# Altium PCB M2male_miniDP.PcbDoc
Units mm, origin at the board's own origin, x right, y up, seen from the top; angles counter-clockwise.
Board outline 22 x 80 mm, 2 copper layers (Top Layer, Bottom Layer); 7 components, 18 nets, 103 pads, 71 vias.
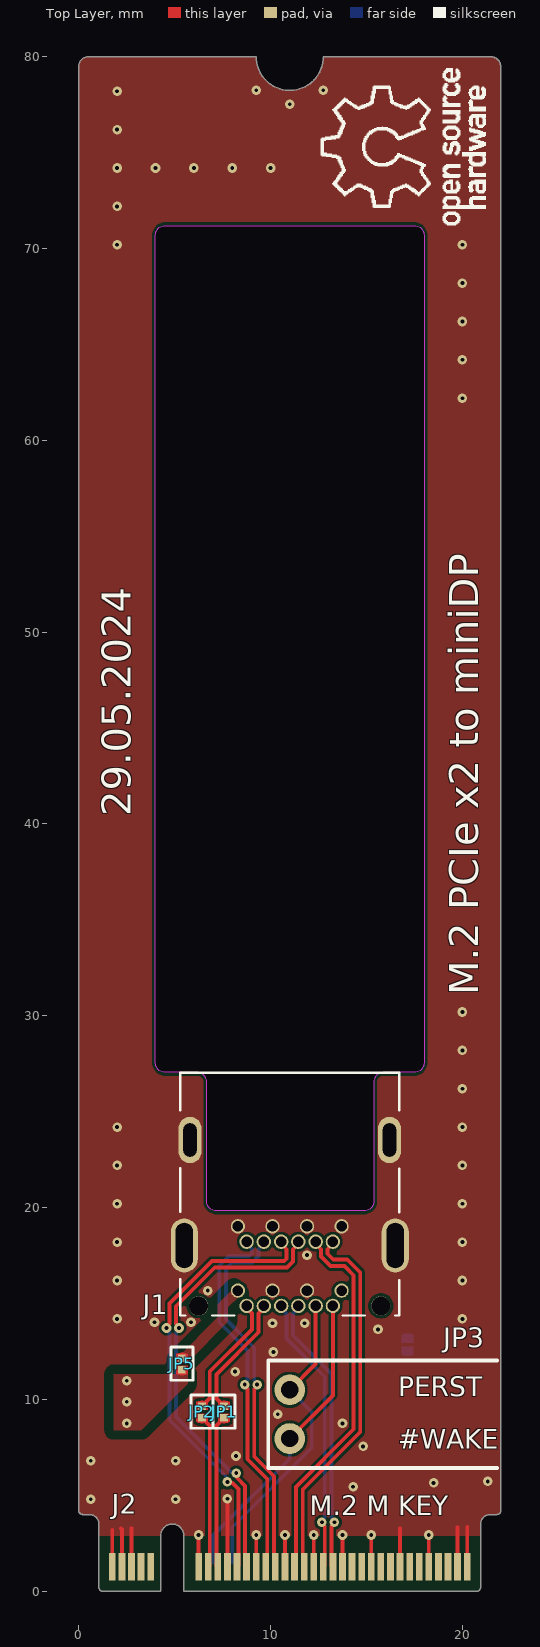
[diagram p0: Top Layer view]
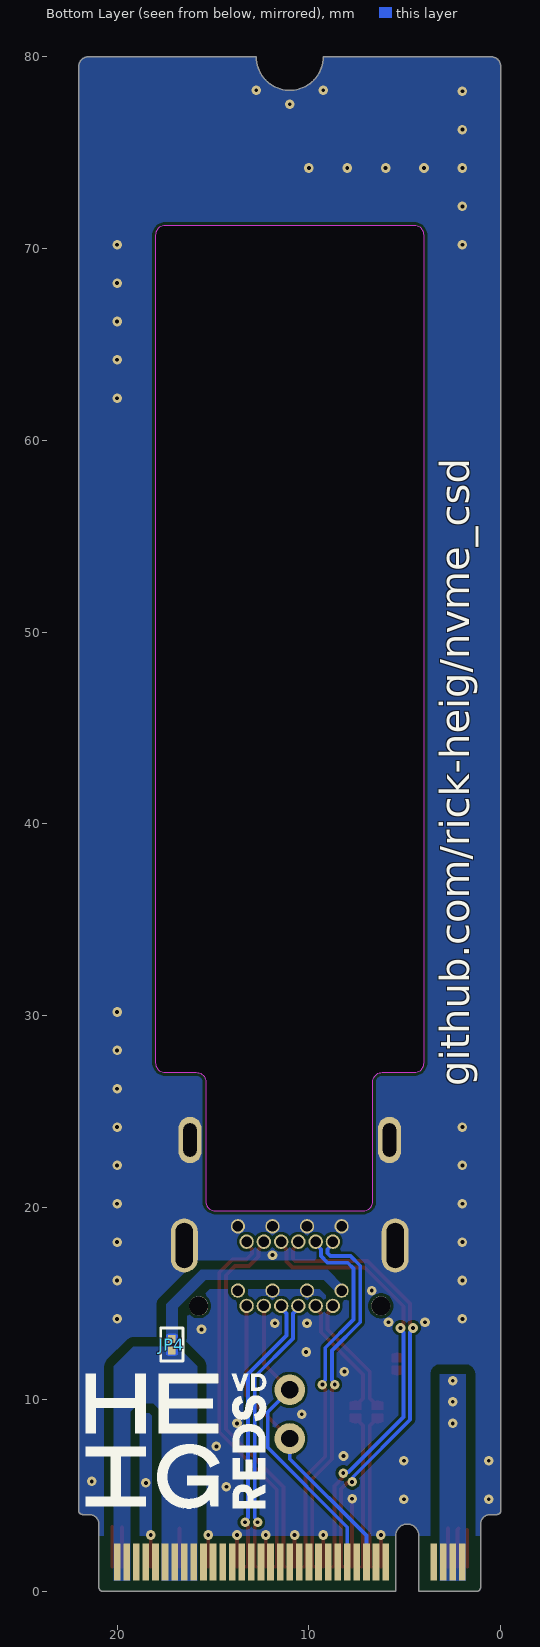
[diagram p1: Bottom Layer view, seen from below]

## Layer stack, top to bottom
Top Solder: solder mask 0.0102, Solder Resist, Dk 3.5
Top Layer: signal copper 0.0356
Dielectric 1: dielectric 0.32, FR-4, Dk 4.8
Bottom Layer: signal copper 0.0356
Bottom Solder: solder mask 0.0102, Solder Resist, Dk 3.5

## Board outline
1.05,0.2 ccw(c1.25,0.2) 1.25,0 4.275,0 4.275,2.9 cw(c4.875,2.9) 4.875,3.5 cw(c4.875,2.9) 5.475,2.9 5.475,0 20.75,0 ccw(c20.75,0.2) 20.95,0.2 20.95,3.5 cw(c21.45,3.5) 21.45,4 21.8,4 ccw(c21.8,4.2) 22,4.2 22,79.5 ccw(c21.5,79.5) 21.5,80 12.75,80 cw(c11,80) 9.25,80 0.5,80 ccw(c0.5,79.5) 0,79.5 0,4.2 ccw(c0.2,4.2) 0.2,4 0.55,4 cw(c0.55,3.5) 1.05,3.5
cut-out: 6.675,26.55 ccw(c6.175,26.55) 6.175,27.05 4.5,27.05 cw(c4.5,27.55) 4,27.55 4,70.7 cw(c4.5,70.7) 4.5,71.2 17.5,71.2 cw(c17.5,70.7) 18,70.7 18,27.55 cw(c17.5,27.55) 17.5,27.05 15.875,27.05 ccw(c15.875,26.55) 15.375,26.55 15.375,20.325 cw(c14.875,20.325) 14.875,19.825 7.175,19.825 cw(c7.175,20.325) 6.675,20.325

## Design rules (kind name [scope] priority, off if disabled: settings)
Clearance [All] p1: gap=0.15 ignorepadtopadclearanceinfootprint=FALSE except(0.149: Track-SMDPad SMDPad-SMDPad SMDPad-Poly; 0.5: Poly-Poly)
Clearance Clearance_DIFF [InAnyDifferentialPair] p2: gap=0.15 ignorepadtopadclearanceinfootprint=FALSE
Clearance Clearance_TOP [InNamedPolygon('GND-TOP')] p3: gap=0.15 ignorepadtopadclearanceinfootprint=FALSE
Clearance Clearance_BOTTOM [InNamedPolygon('GND-BOTTOM')] p4: gap=0.15 ignorepadtopadclearanceinfootprint=FALSE
ComponentClearance [All] p1: gap=0.254 collisioncheckmode=3 verticalgap=0.254 showdistances=FALSE donotcheckwithout3dbody=TRUE
DiffPairsRouting [All] p1: maxlimit=0.15 minlimit=0.15 mostfreqgap=0.15 toplayer_minwidth=0.2 toplayer_maxwidth=0.2 toplayer_prefwidth=0.2 bottomlayer_minwidth=0.2 bottomlayer_maxwidth=0.2 bottomlayer_prefwidth=0.2 impedanceprofiledriven=TRUE impedanceprofileid={8BE430F4-6E11-4254-9D0B-8478A02E9357} maxuncoupledlength=12.7
HoleSize [All] p1: absolutevalues=TRUE maxlimit=5 minlimit=0.025 maxpercent=80.000 minpercent=20.000
HoleToHoleClearance [All] p1: gap=0.15 allowstackedmicrovias=TRUE
Length [All] p1: maxlimit=2540 minlimit=0
MatchedLengths MatchLengths_xSignals_J2_J1 [All] p1: tolerance=0.05 checknetsindiffpair=TRUE checkdiffpairvsdiffpair=FALSE checkxsignals=FALSE checkothers=FALSE
MinimumSolderMaskSliver [All] p1: minsoldermaskwidth=0.075
PlaneConnect [All] p1: planeconnectstyle=Direct reliefexpansion=0.508 reliefentries=4 reliefconductorwidth=0.254 reliefairgap=0.254
PolygonConnect PolygonConnect_10 [All vs IsNamedPolygon('NETJ1_20_POWER')] p1: connectstyle=Direct reliefconductorwidth=0.254 reliefentries=4 polygonreliefangle="90 Angle" airgapwidth=0.254
PolygonConnect PolygonConnect_9 [All vs IsNamedPolygon('3.3V_1')] p2: connectstyle=Direct reliefconductorwidth=0.254 reliefentries=4 polygonreliefangle="90 Angle" airgapwidth=0.254
PolygonConnect PolygonConnect_8 [All vs IsNamedPolygon('3.3V_2')] p3: connectstyle=Direct reliefconductorwidth=0.254 reliefentries=4 polygonreliefangle="90 Angle" airgapwidth=0.254
PolygonConnect PolygonConnect_7 [All vs IsNamedPolygon('Bottom Layer-3.3V')] p4: connectstyle=Direct reliefconductorwidth=0.254 reliefentries=4 polygonreliefangle="90 Angle" airgapwidth=0.254
PolygonConnect PolygonConnect_6 [All vs IsNamedPolygon('NetJ1_20_POWER')] p5: connectstyle=Direct reliefconductorwidth=0.254 reliefentries=4 polygonreliefangle="90 Angle" airgapwidth=0.254
PolygonConnect PolygonConnect_5 [All vs IsNamedPolygon('NetJ1_20_POWER')] p6: connectstyle=Direct reliefconductorwidth=0.254 reliefentries=4 polygonreliefangle="90 Angle" airgapwidth=0.254
PolygonConnect PolygonConnect_4 [All vs IsNamedPolygon('GND-BOTTOM')] p7: connectstyle=Direct reliefconductorwidth=0.254 reliefentries=4 polygonreliefangle="90 Angle" airgapwidth=0.254
PolygonConnect PolygonConnect_3 [All vs IsNamedPolygon('GND-TOP')] p8: connectstyle=Direct reliefconductorwidth=0.254 reliefentries=4 polygonreliefangle="90 Angle" airgapwidth=0.254
PolygonConnect PolygonConnect_2 [All vs IsNamedPolygon('GND-BOTTOM')] p9: connectstyle=Direct reliefconductorwidth=0.254 reliefentries=4 polygonreliefangle="90 Angle" airgapwidth=0.254
PolygonConnect PolygonConnect_1 [All vs IsNamedPolygon('GND-BOTTOM')] p10: connectstyle=Direct reliefconductorwidth=0.254 reliefentries=4 polygonreliefangle="90 Angle" airgapwidth=0.254
PolygonConnect [All] p11: connectstyle=Relief reliefconductorwidth=0.254 reliefentries=4 polygonreliefangle="90 Angle" airgapwidth=0.254
RoutingVias [All] p1: holewidth=0.2 width=0.5 viastyle="Through Hole" minholewidth=0.15 minwidth=0.4 maxholewidth=0.4 maxwidth=0.8
SilkToSilkClearance [All] p1: silktosilkclearance=0.2
SilkToSolderMaskClearance [IsPad] p1: minsilkscreentomaskgap=0.2 clearancetoexposedcopper=TRUE
SolderMaskExpansion [All] p1: expansion=0.102 istentingtop=FALSE
SupplyNets "Schematic Supply Nets_3" [InNet('3.3V_2')] p1: voltage=0.000
SupplyNets "Schematic Supply Nets_2" [InNet('3.3V_1')] p2: voltage=0.000
SupplyNets "Schematic Supply Nets" [InNet('GND')] p3: voltage=0.000
Width [All] p1: maxlimit=0.5 minlimit=0.1 preferedwidth=0.2
22 further rules are at their usual default settings.

## Classes and differential pairs
differential pair PET1: +PET1_P -PET1_N
differential pair PET0: +PET0_P -PET0_N
differential pair PER1: +PER1_P -PER1_N
differential pair PER0: +PER0_P -PER0_N
differential pair miniDP_CLK: +miniDP_CLK_P -miniDP_CLK_N
differential pair CLK: +CLK_P -CLK_N

## Components (designator, comment, footprint, x,y, rotation, side; value= is the part's Value field where it differs from the comment)
J1 "2129320-3" CONN_2129320-3 11,23.525 r180 top locked
J2 "NGFF_M_V2" M.2-M-KEY-2280-V2 11,0 r0 top locked value=NGFF_M
JP1 "JUMPER_A_SOUDER" "JUMPER_A_SOUDER (0201)" 7.575,9.35 r90 top value=0201
JP2 "JUMPER_A_SOUDER" "JUMPER_A_SOUDER (0201)" 6.425,9.35 r90 top value=0201
JP3 "HEADER_2" "Barette simple 2.54mm  2 POLES 90 degres MALE" 11,9.23 r90 top
JP4 "JUMPER_A_SOUDER" "JUMPER_A_SOUDER (0201)" 17.15,12.85 r90 bottom value=0201
JP5 "JUMPER_A_SOUDER" "JUMPER_A_SOUDER (0201)" 5.375,11.85 r90 top value=0201

## Footprints (in the part's own frame and the unit in brackets; to place one, negate y for a bottom-side part, rotate by r counter-clockwise, add the part's x,y. Pads: shape width x height; smd on the part's side, far side on the other; paste and mask are expansions set on the pad)
"Barette simple 2.54mm  2 POLES 90 degres MALE" [mm] "Barette simple 2.54mm SMD 2 pôles - 90 degres Mâle"
  round 1.6 hole 0.9 mask+0.1: 1(-1.27,0) 2(1.27,0)
  silkscreen extent -2.8,-10.8 2.8,1.13, body extent -2.54,-10.81 2.54,0.3, height 3.05
CONN_2129320-3 [mm]
  round 0.75 hole 0.55: 1G(-2.7,4.5) 2(-2.7,7.85) 3(-2.25,5.3) 4(-2.25,8.65) 5(-1.35,5.3) 6(-1.35,8.65) 7G(-0.9,4.5) 8G(-0.9,7.85) 9(-0.45,5.3) 10(-0.45,8.65) 11(0.45,5.3) 12(0.45,8.65) 13G(0.9,4.5) 14G(0.9,7.85) 15(1.35,5.3) 16(1.35,8.65) 17(2.25,5.3) 18(2.25,8.65) 19G(2.7,4.5) 20_POWER(2.7,7.85)
  oval 1.408x2.816 hole 0.9 slot 2.35 at 90 deg: 21(-5.5,5.5) 22(5.5,5.5)
  oval 1.208x2.416 hole 0.7 slot 1.74 at 90 deg: 23(5.2,0) 24(-5.2,0)
  round 1 hole 1 unplated: ""(-4.75,8.65) ""(4.75,8.65)
  silkscreen extent -5.7,-3.5 5.7,9.15, body extent -5.72,-3.52 5.68,9.13, height 4.21
"JUMPER_A_SOUDER (0201)" [mm]
  rect 0.4x0.4 smd paste-10: 1(-0.3,0) 2(0.3,0)
  Top Layer region: 0.1,0.3 0.1,-0.3 0.525,-0.3 0.584,0 0.525,0.3 0.525,0.3
  Top Layer region: -0.1,-0.3 -0.1,0.3 -0.525,0.3 -0.584,0 -0.525,-0.3 -0.525,-0.3
  silkscreen extent -0.85,-0.58 0.87,0.58
M.2-M-KEY-2280-V2 [mm] "M.2-KEY-M"
  rect 0.35x1.45 smd mask+0: 1(9.25,1.275) 3(8.75,1.275) 5(8.25,1.275) 7(7.75,1.275) 9(7.25,1.275) 11(6.75,1.275) 13(6.25,1.275) 15(5.75,1.275) 17(5.25,1.275) 19(4.75,1.275) 21(4.25,1.275) 23(3.75,1.275) 25(3.25,1.275) 27(2.75,1.275) 29(2.25,1.275) 31(1.75,1.275) 33(1.25,1.275) 35(0.75,1.275) 37(0.25,1.275) 39(-0.25,1.275) 41(-0.75,1.275) 43(-1.25,1.275) 45(-1.75,1.275) 47(-2.25,1.275) 49(-2.75,1.275) 51(-3.25,1.275) 53(-3.75,1.275) 55(-4.25,1.275) 57(-4.75,1.275) 67(-7.25,1.275) 69(-7.75,1.275) 71(-8.25,1.275) 73(-8.75,1.275) 75(-9.25,1.275)
  rect 0.35x1.95 smd far side mask+0: 2(9,1.525) 4(8.5,1.525) 6(8,1.525) 8(7.5,1.525) 10(7,1.525) 12(6.5,1.525) 14(6,1.525) 16(5.5,1.525) 18(5,1.525) 20(4.5,1.525) 22(4,1.525) 24(3.5,1.525) 26(3,1.525) 28(2.5,1.525) 30(2,1.525) 32(1.5,1.525) 34(1,1.525) 36(0.5,1.525) 38(0,1.525) 40(-0.5,1.525) 42(-1,1.525) 44(-1.5,1.525) 46(-2,1.525) 48(-2.5,1.525) 50(-3,1.525) 52(-3.5,1.525) 54(-4,1.525) 56(-4.5,1.525) 58(-5,1.525) 68(-7.5,1.525) 70(-8,1.525) 72(-8.5,1.525) 74(-9,1.525)

## Part data
J1: "Conn Display Port RCP 20 POS 0.9mm/1.8mm Solder RA Thru-Hole 20 Terminal 1 Port T/R", Package=None, Centerline_Pitch=".6 mm[.02 in]", Digi-Key_Part_Number=A120537CT-ND, Digi-Key_Purchase_URL=https://www.digikey.com/product-detail/en/te-connectivity-amp-connectors/2129320-3/A120537CT-ND/5021748?utm_source=snapeda&utm_medium=aggregator&utm_campaign=symbol, EU_RoHS_Compliance=Compliant, MF="TE Connectivity", MP=2129320-3, Number_of_Positions=20, Product_Type=Connector, SnapEDA_Link=https://www.snapeda.com/parts/2129320-3/TE%20Connectivity%20AMP%20Connectors/view-part/1192429/?ref=snap, TE_purchase_URL=https://www.te.com/usa-en/product-2129320-3.html?te_bu=Cor&te_type=disp&te_campaign=seda_glo_cor-seda-global-disp-prtnr-fy19-seda-model-bom-cta_sma-317_1&elqCampaignId=32493
JP1 JP2 JP4 JP5: library part 683, "Pont à souder sur print", Component=Connector, Component Type Category Connector Type="Jumper à souder", ID=683, RoHS Compliant=False
JP3: library part 421, "Barrette mâle 90 degrés 2P 2,54 mm", Manufacturer="TE Connectivity", Manufacturer P/N=5-826631-0, Supplier Part Number 1=122359, Component=Connector, Component Type Category Connector Type="Barrette 2.54mm 90 degres", ComponentLink1Description=Datasheet, ComponentLink1URL=http://www.te.com/catalog/pn/en/5-826631-0, ComponentLink2Description=Supplier, ComponentLink2URL=http://www.distrelec.ch/fr/Barrette-%C3%A0-broches-50-p%C3%B4les-1-x50P-TE-Connectivity-5-826631-0/p/14371409?q=122359&page=1&origPos=1&origPageSize=10&simi=99.3, ID=421, Pitch=2,54mm, RoHS Compliant=True, Supplier 1=Distrelec, Supplier 2=Mouser, Supplier Part Number 2=571-5-826631-0

## Via types
v1: diameter 0.5, hole 0.2, Top Layer to Bottom Layer, tented both sides, 71 vias

## Nets (pads, with @x,y where several pads share a name; then routed paths per layer and width w, separated by ;. In a path a pad name is that pad's centre, name@x,y a point inside that pad or via, vN(x,y) a via of type N, cw(c..) or ccw(c..) an arc to the next point about the centre after c; other vN are vias at no path point)
3.3V_1: J2.2 J2.4 J2.12 J2.14 J2.16 J2.18 JP4.1
3.3V_2: J2.70 J2.72 J2.74 JP5.1
  other v1: 2.5,8.75 2.5,9.875 2.5,10.975
CLK_N: J2.53 JP1.1 | length 8
  Top Layer w0.2: J2.53 7.175,1.35 7.175,2.104 7.175,5.589 7.175,8.65 JP1.1
CLK_P: J2.55 JP2.1 | length 8
  Top Layer w0.2: JP2.1 6.825,8.65 6.825,5.444 6.825,2.104 6.825,1.35 J2.55
GND: J1.1G J1.7G J1.8G J1.13G J1.14G J1.19G J1.21 J1.22 J1.23 J1.24 J2.1 J2.3 J2.9 J2.15 J2.21 J2.27 J2.33 J2.39 J2.45 J2.51 J2.57 J2.71 J2.73 J2.75 | length 27.1
  Top Layer w0.2: J2.75 1.75,3.2 ; 2.2,3.275 2.25,3.225 J2.73 ; J2.71 2.75,3.275 ; J2.57 v1(6.25,2.933) ; J2.51 v1(7.75,4.825) ; J2.45 v1(9.25,2.933) ; J2.39 v1(10.75,2.933) ; J2.33 v1(12.25,2.933) ; J2.27 v1@13.75,2.883 ; J2.21 v1@15.25,2.883 ; J2.15 16.75,3.275 ; J2.9 v1@18.25,2.883 ; J2.3 19.75,3.325 ; J2.1 20.25,3.35
  other v1: 13.75,2.933 15.25,2.933 18.25,2.933 0.625,4.8 5.05,4.8 14.3,5.45 18.5,5.65 21.325,5.725 0.625,6.8 5.05,6.8 8.2,7.05 14.825,7.55 13.75,8.75 10.375,9.225 8.15,11.45 10.15,12.475 15.6,13.65 10.1,13.975 11.775,13.975 3.95,14.025 5.85,14.025 2,14.2 20,14.2 6.725,15.675 2,16.2 20,16.2 11.9,17.525 2,18.2 20,18.2 2,20.2 20,20.2 2,22.2 20,22.2 2,24.2 20,24.2 20,26.2 20,28.2 20,30.2 20,62.2 20,64.2 20,66.2 20,68.2 2,70.2 20,70.2 2,72.2 2,74.2 4,74.2 6,74.2 8,74.2 10,74.2 2,76.2 11,77.525 2,78.2 9.25,78.25 12.75,78.25
miniDP_CLK_N: J1.16 JP1.2 | length 6.4
  Top Layer w0.2: JP1.2 7.175,10.05 7.175,11.3 9.375,13.5 9.375,14.483 9.65,14.758 J1.16
miniDP_CLK_P: J1.18 JP2.2 | length 6.4
  Top Layer w0.2: JP2.2 6.825,10.05 6.825,11.445 9.025,13.645 9.025,14.483 8.75,14.758 J1.18
NetJ1_20_POWER: J1.20_POWER JP4.2 JP5.2
PER0_N: J1.15 J2.41 | length 19.6
  Top Layer w0.2: v1(9.3,10.775) 9.3,10.694 9.15,10.544 9.15,7.023 10.175,5.998 10.175,2.104 10.175,1.35 J2.41
  Bottom Layer w0.2: v1(9.3,10.775) 9.3,10.856 9.15,11.006 9.15,12.697 7.675,14.172 7.675,16.825 7.975,17.125 9.025,17.125 9.375,17.475 9.375,17.833 9.65,18.108 J1.15
PER0_P: J1.17 J2.43 | length 19.6
  Top Layer w0.2: v1(8.65,10.775) 8.65,10.694 8.8,10.544 8.8,6.878 9.825,5.853 9.825,2.104 9.825,1.35 J2.43
  Bottom Layer w0.2: v1(8.65,10.775) 8.65,10.856 8.8,11.006 8.8,12.552 7.325,14.027 7.325,16.97 7.83,17.475 8.88,17.475 9.025,17.62 9.025,17.833 8.75,18.108 J1.17
PER1_N: J1.10 J2.29 | length 14.7
  Top Layer w0.2: J2.29 13.175,1.35 13.175,2.104 13.175,3.369 13.325,3.519 v1(13.325,3.6)
  Bottom Layer w0.2: J1.10 11.45,14.758 11.175,14.483 11.175,13.325 13.175,11.325 13.175,3.831 13.325,3.681 v1(13.325,3.6)
PER1_P: J1.12 J2.31 | length 14.7
  Top Layer w0.2: v1(12.675,3.6) 12.675,3.519 12.825,3.369 12.825,2.104 12.825,1.35 J2.31
  Bottom Layer w0.2: J1.12 10.55,14.758 10.825,14.483 10.825,13.18 12.825,11.18 12.825,3.831 12.675,3.681 v1(12.675,3.6)
PERST: J1.6 J2.50 JP3.2 | length 16.1
  Top Layer w0.2: JP3.2 12.35,11.85 J1.6
  Bottom Layer w0.2: J2.50 8,3.338 12.15,7.488 12.15,9.35 JP3.2
PET0_N: J1.9 J2.47 | length 23.6
  Top Layer w0.2: v1(5.225,13.725) 5.225,13.806 5.075,13.956 5.075,14.855 7.09,16.87 10.853,16.87 11.175,17.192 11.175,17.833 11.45,18.108 J1.9 ; v1(8.21,6.16) 8.267,6.102 8.267,5.89 8.675,5.482 8.675,2.017 8.675,1.35 J2.47
  Bottom Layer w0.2: v1(5.225,13.725) 5.225,13.644 5.075,13.494 5.075,9.082 7.94,6.217 8.152,6.217 v1(8.21,6.16)
PET0_P: J1.11 J2.49 | length 23.6
  Top Layer w0.2: v1(4.575,13.725) 4.575,13.806 4.725,13.956 4.725,15 6.945,17.22 10.708,17.22 10.825,17.337 10.825,17.833 10.55,18.108 J1.11 ; v1(7.75,5.7) 7.807,5.643 8.02,5.643 8.325,5.337 8.325,2.017 8.325,1.35 J2.49
  Bottom Layer w0.2: v1(4.575,13.725) 4.575,13.644 4.725,13.494 4.725,8.937 7.693,5.97 7.693,5.757 v1(7.75,5.7)
PET1_N: J1.3 J2.35 | length 19.5
  Top Layer w0.2: J2.35 11.675,1.35 11.675,2.017 11.675,5.297 14.675,8.297 14.675,16.62 13.995,17.3 13.27,17.3 12.975,17.595 12.975,17.833 13.25,18.108 J1.3
PET1_P: J1.5 J2.37 | length 19.5
  Top Layer w0.2: J2.37 11.325,1.35 11.325,2.017 11.325,5.442 14.325,8.442 14.325,16.475 13.85,16.95 13.125,16.95 12.625,17.45 12.625,17.833 12.35,18.108 J1.5
PEWAKE: J1.4 J2.54 JP3.1 | length 15.9
  Top Layer w0.2: JP3.1 13.25,10.21 J1.4
  Bottom Layer w0.2: J2.54 7,2.9 11,6.9 JP3.1
pads on no net: J1. J1.2 J2.5 J2.6 J2.7 J2.8 J2.10 J2.11 J2.13 J2.17 J2.19 J2.20 J2.22 J2.23 J2.24 J2.25 J2.26 J2.28 J2.30 J2.32 J2.34 J2.36 J2.38 J2.40 J2.42 J2.44 J2.46 J2.48 J2.52 J2.56 J2.58 J2.67 J2.68 J2.69

## Polygon pours and split planes (outlines as drawn)
no net on Bottom Solder "GND-001" (solid): 13.85,80 cw(c11,80) 8.15,80 9.25,80 ccw(c11,80) 12.75,80
no net on Top Solder "GND-001" (solid): 13.85,80 cw(c11,80) 8.15,80 9.25,80 ccw(c11,80) 12.75,80
3.3V_1 on Bottom Layer "3.3V_1" (solid, pour order 5): 17.675,9.35 18.125,9.8 18.875,9.8 19.325,9.35 19.325,0.55 20.175,0.55 20.175,11.725 19.15,12.75 16.85,12.75 15.825,11.725 15.825,0.55 17.675,0.55
GND on Bottom Layer "GND-bottom" (solid, pour order 11): 1.05,2.9 4.275,2.9 cw(c4.875,2.9) 4.875,3.5 cw(c4.875,2.9) 5.475,2.9 20.95,2.9 20.95,3.5 cw(c21.45,3.5) 21.45,4 21.8,4 ccw(c21.8,4.2) 22,4.2 22,79.5 ccw(c21.5,79.5) 21.5,80 12.75,80 cw(c11,80) 9.25,80 0.5,80 ccw(c0.5,79.5) 0,79.5 0,4.2 ccw(c0.2,4.2) 0.2,4 0.55,4 cw(c0.55,3.5) 1.05,3.5
NetJ1_20_POWER on Bottom Layer "NetJ1_20_POWER" (solid, pour order 9): 16.85,12.95 16.85,14.775 15.375,16.25 9.225,16.25 8.575,15.6 8.225,15.95 9.025,16.75 15.65,16.75 17.45,14.95 17.45,12.95
3.3V_2 on Bottom Layer "3.3V_2" (solid, pour order 1): 1.825,0.55 1.825,11.325 3.175,11.325 3.175,0.55
NetJ1_20_POWER on Top Layer "NETJ1_20_POWER" (solid, pour order 2): 5.075,11.95 5.075,12.1 7.25,14.275 7.25,14.975 8.1,15.825 8.45,15.475 7.775,14.8 7.775,14.05 5.675,11.95
3.3V_2 on Top Layer "3.3V_2" (solid, pour order 2): 5.675,11.325 1.825,11.325 1.825,8.4 3.25,8.4 5.675,10.825
GND on Top Layer "GND-TOP" (solid, pour order 12): 1.05,2.9 4.275,2.9 cw(c4.875,2.9) 4.875,3.5 cw(c4.875,2.9) 5.475,2.9 20.95,2.9 20.95,3.5 cw(c21.45,3.5) 21.45,4 21.8,4 ccw(c21.8,4.2) 22,4.2 22,79.5 ccw(c21.5,79.5) 21.5,80 12.75,80 cw(c11,80) 9.25,80 0.5,80 ccw(c0.5,79.5) 0,79.5 0,4.2 ccw(c0.2,4.2) 0.2,4 0.55,4 cw(c0.55,3.5) 1.05,3.5

## Silkscreen, mask and mechanical layers (free items; w line width, h text height)
Top Overlay:
  drawing of 18 lines, arcs and shapes, not listed
  text "29.05.2024" at 2.721,40.404 h1.52 r90
  text "M.2 PCIe x2 to miniDP" at 20.821,31.079 h1.52 r90
  text "PERST" at 16.65,10.167 h1
  text "#WAKE" at 16.65,7.425 h1
  text "M.2 M KEY" at 12.05,3.95 h1
Bottom Overlay:
  drawing of 10 lines, arcs and shapes, not listed
  text "github.com/rick-heig/nvme_csd" at 1.637,26.329 h1.52 r270
Mechanical 1:
  lines w0.2: 6.175,27.05 cw(c6.175,26.55) 6.675,26.55 6.675,20.325 ; 6.175,27.05 4.5,27.05 cw(c4.5,27.55) 4,27.55 4,70.7 cw(c4.5,70.7) 4.5,71.2 17.5,71.2 cw(c17.5,70.7) 18,70.7 18,27.55 cw(c17.5,27.55) 17.5,27.05 17.5,27.05 15.875,27.05 ccw(c15.875,26.55) 15.375,26.55 15.375,26.55 15.375,20.325 cw(c14.875,20.325) 14.875,19.825 ; 6.175,27.05 6.175,27.05 ; 6.675,20.325 ccw(c7.175,20.325) 7.175,19.825 14.875,19.825 ; 6.675,20.325 6.675,20.325 ; 14.875,19.825 14.875,19.825 ; 0,4.2 ccw(c0.2,4.2) 0.2,4 0.55,4 cw(c0.55,3.5) 1.05,3.5 1.05,0.2 ccw(c1.25,0.2) 1.25,0 4.275,0 4.275,2.9 cw(c4.875,2.9) 4.875,3.5 cw(c4.875,2.9) 5.475,2.9 5.475,0 20.75,0 ccw(c20.75,0.2) 20.95,0.2 20.95,3.5 cw(c21.45,3.5) 21.45,4 21.8,4 ccw(c21.8,4.2) 22,4.2 22,79.5 ccw(c21.5,79.5) 21.5,80 12.75,80 cw(c11,80) 9.25,80 0.5,80 ccw(c0.5,79.5) 0,79.5 0,4.2